# Altium PCB Optical Compressor V2.PcbDoc (part 2 of 2)
Units mm, origin at the board's own origin, x right, y up, seen from the top; angles counter-clockwise.
Board outline 47 x 95 mm, 4 copper layers (Top Copper, Ground Top, Ground Bottom, Bottom Copper), stack 1.706 mm thick; 141 components, 86 nets, 384 pads, 31 vias.
Unrouted connection lines stored in the file: 163.
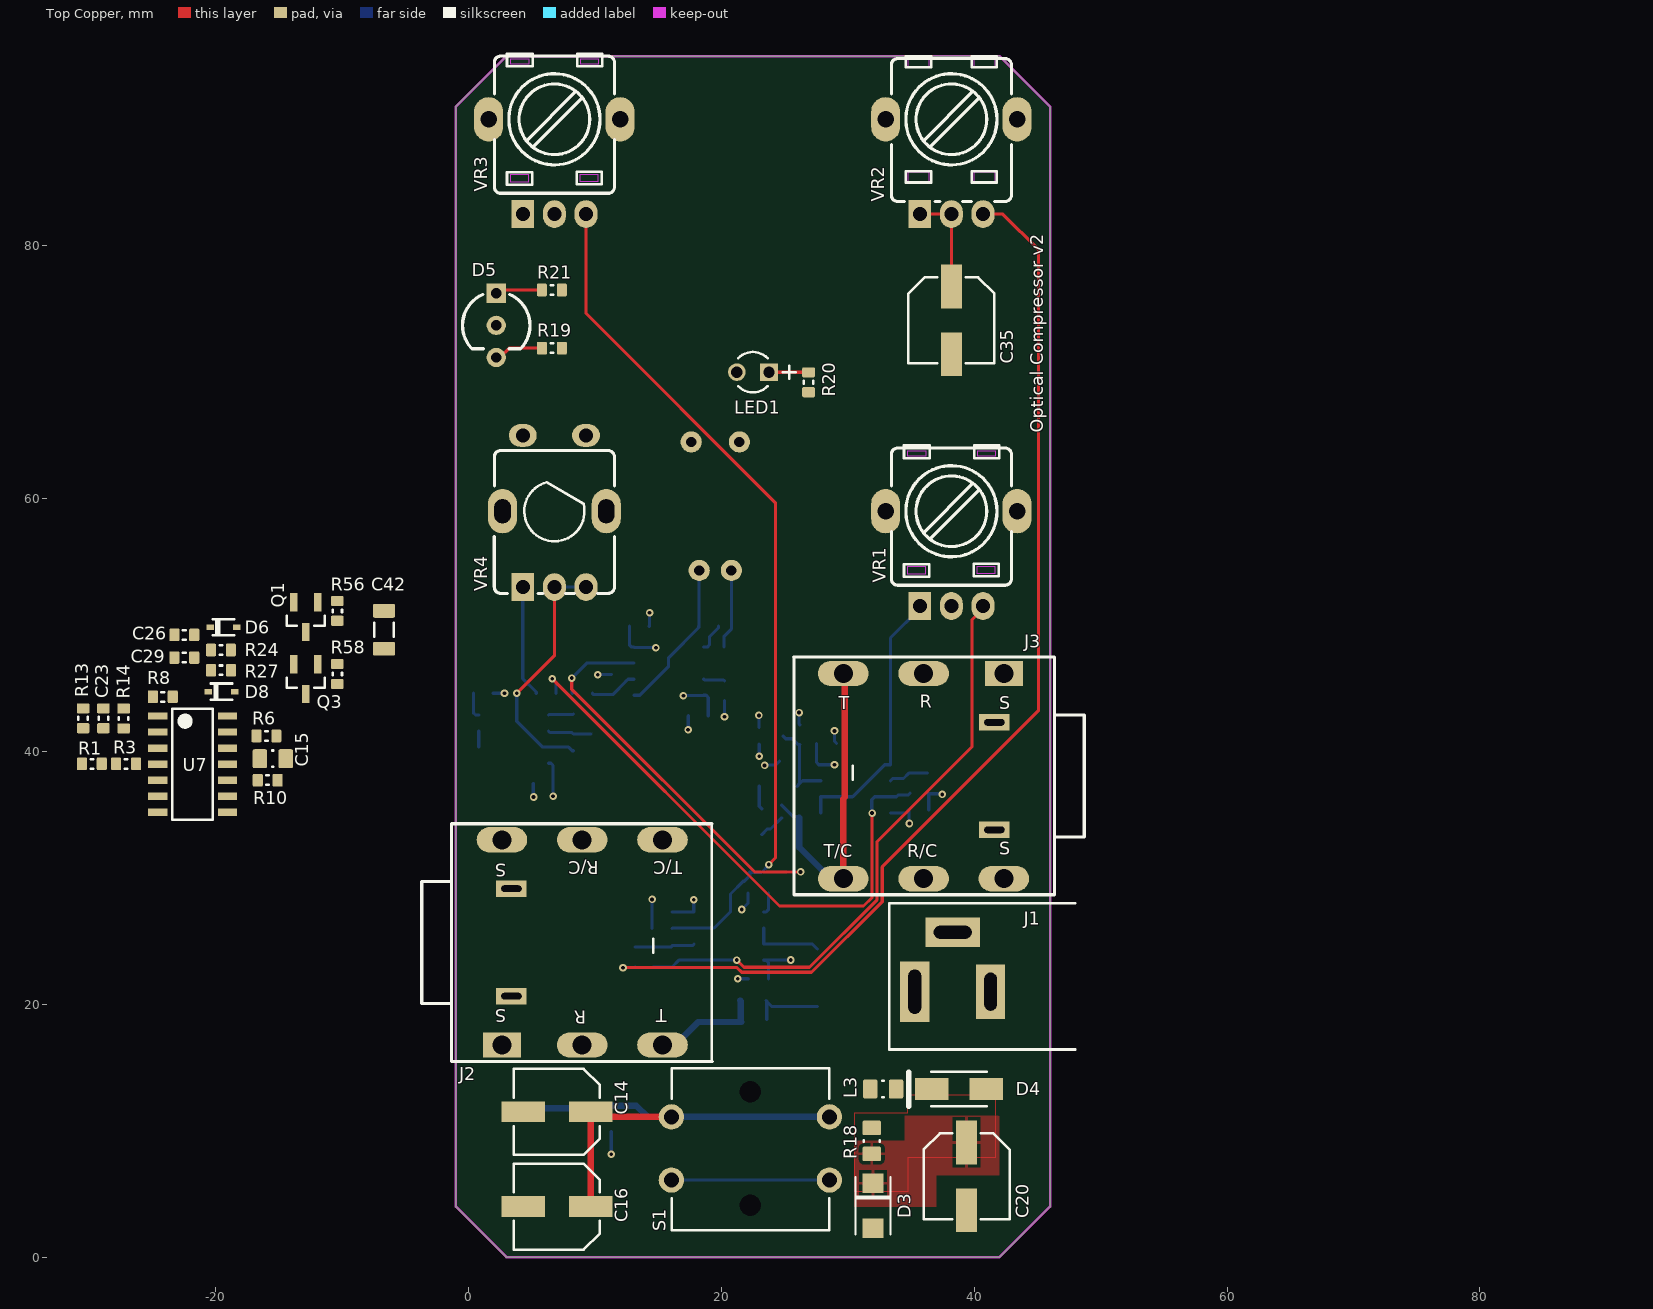
[diagram p0: Top Copper view]

## Part data (continued)
U1 U2 U4 U5: library part CMP-028-0012-7, "Operational Amplifiers - Op Amps Dual Low Noise JFET SOIC8", Case/Package=D, Dual Supply Voltage=9V, Input Bias Current=200pA, Input Offset Voltage (Vos)=3mV, Manufacturer 1="Texas Instruments", Max Dual Supply Voltage=18V, Max I/O Voltage=10mV, Max Operating Temperature=85°C, Min Dual Supply Voltage=3.5V, Min Operating Temperature=-40°C, Nominal Supply Current=5mA, Operating Supply Current=1.4mA, Package Quantity=75, Voltage Gain=106.02dB, Bandwidth=3MHz, Common Mode Rejection Ratio=70dB, ComponentLink1Description=http://www.ti.com/general/docs/lit/getliterature.tsp?genericPartNumber=TL072&&fileType=pdf&src-supplier=Avnet, ComponentLink1URL=http://www.ti.com/general/docs/lit/getliterature.tsp?genericPartNumber=TL072&&fileType=pdf&src-supplier=Avnet, ComponentLink2Description=https://www.distrelec.biz/Web/Downloads/_t/ds/tl07x-series_eng_tds.pdf?mime=application%2Fpdf&src-supplier=Distrelec, ComponentLink2URL=https://www.distrelec.biz/Web/Downloads/_t/ds/tl07x-series_eng_tds.pdf?mime=application%2Fpdf&src-supplier=Distrelec, ComponentLink3Description=http://www.ti.com/lit/ds/symlink/tl071a.pdf?src-supplier=Digi-Key, ComponentLink3URL=http://www.ti.com/lit/ds/symlink/tl071a.pdf?src-supplier=Digi-Key, ComponentLink4Description=http://www.farnell.com/datasheets/1862384.pdf?src-supplier=Element14, ComponentLink4URL=http://www.farnell.com/datasheets/1862384.pdf?src-supplier=Element14, ComponentLink5Description=http://focus.ti.com/lit/ds/symlink/tl074.pdf?src-supplier=Avnet+Asia, ComponentLink5URL=http://focus.ti.com/lit/ds/symlink/tl074.pdf?src-supplier=Avnet+Asia, Design Item ID=TL072CD, Gain Bandwidth Product=3MHz, Height=1.58mm, Lead Free="Lead Free", Length=4.9mm, Manufacturer Part Number 1=TL072CD, Nominal Gain Bandwidth Product=3MHz, Number of Amplifiers=2, Number of Channels=2, Number of Circuits=2, Number of Elements=2, Number of Pins=8, Operating Supply Voltage=18V, Packaging=Rail/Tube, PartId=1, Pricing 1="1 = 0.71000, 10 = 0.59500, 50 = 0.59500, 100 = 0.38400, 1000 = 0.30700, 10000 = 0.25000 (USD)", Radiation Hardening=No, REACH SVHC="No SVHC", RoHS=Yes, Slew Rate=13V/µs, Source=main.SchLib, Stock 1=14514, Unity Gain Bandwidth Product=3MHz, Width=3.91mm
U6: library part CMP-028-0019-6, "Operational Amplifiers - Op Amps 2-18V Quad Low Power Industrial Temp SOIC14", Case/Package=SOIC, Input Bias Current=500nA, Input Offset Voltage (Vos)=3mV, Manufacturer="ON Semiconductor", Manufacturer Part Number=MC33179DR2G, Max Dual Supply Voltage=18V, Max Operating Temperature=85°C, Min Dual Supply Voltage=2V, Min Operating Temperature=-40°C, Nominal Supply Current=1.7mA, Output Current=80mA, Output Current per Channel=100mA, Package Quantity=2500, Power Supply Rejection Ratio (PSRR)=80dB, Voltage Gain=106.02dB, Bandwidth=5MHz, Common Mode Rejection Ratio=80dB, ComponentLink1Description=https://datasheet.ciiva.com/30481/0900766b81276f1b-30481445.pdf?src-supplier=RSComponents, ComponentLink1URL=https://datasheet.ciiva.com/30481/0900766b81276f1b-30481445.pdf?src-supplier=RSComponents, ComponentLink2Description=https://datasheet.ciiva.com/5787/89824-5787686.pdf?src-supplier=Farnell, ComponentLink2URL=https://datasheet.ciiva.com/5787/89824-5787686.pdf?src-supplier=Farnell, ComponentLink3Description=https://datasheet.ciiva.com/26056/mc33178-d-26056822.pdf?src-supplier=Avnet+Europe, ComponentLink3URL=https://datasheet.ciiva.com/26056/mc33178-d-26056822.pdf?src-supplier=Avnet+Europe, ComponentLink4Description=https://datasheet.ciiva.com/1796/mc33178-d-1796957.pdf?src-supplier=Digi-Key, ComponentLink4URL=https://datasheet.ciiva.com/1796/mc33178-d-1796957.pdf?src-supplier=Digi-Key, ComponentLink5Description=https://datasheet.ciiva.com/1796/mc33178-d-1796959.pdf?src-supplier=Digi-Key, ComponentLink5URL=https://datasheet.ciiva.com/1796/mc33178-d-1796959.pdf?src-supplier=Digi-Key, ComponentLink6Description=https://datasheet.ciiva.com/2973/mc33178-d-2973668.pdf?src-supplier=Avnet, ComponentLink6URL=https://datasheet.ciiva.com/2973/mc33178-d-2973668.pdf?src-supplier=Avnet, ComponentLink7Description=https://datasheet.ciiva.com/16212/mc33178-d-16212327.pdf?src-supplier=Future+Electronics, ComponentLink7URL=https://datasheet.ciiva.com/16212/mc33178-d-16212327.pdf?src-supplier=Future+Electronics, ComponentLink8Description=https://datasheet.ciiva.com/8078/89824-8078570.pdf?src-supplier=Element14, ComponentLink8URL=https://datasheet.ciiva.com/8078/89824-8078570.pdf?src-supplier=Element14, ComponentLink9Description=https://datasheet.ciiva.com/1796/mc33178-d-1796958.pdf?src-supplier=Digi-Key, ComponentLink9URL=https://datasheet.ciiva.com/1796/mc33178-d-1796958.pdf?src-supplier=Digi-Key, ComponentLink10Description=http://datasheet.octopart.com/MC33179DR2G-ON-Semiconductor-datasheet-164248.pdf?src-supplier=Newark, ComponentLink10URL=http://datasheet.octopart.com/MC33179DR2G-ON-Semiconductor-datasheet-164248.pdf?src-supplier=Newark, ComponentLink11Description=http://datasheet.octopart.com/MC33179DR2G-ON-Semiconductor-datasheet-14137761.pdf?src-supplier=IIIC, ComponentLink11URL=http://datasheet.octopart.com/MC33179DR2G-ON-Semiconductor-datasheet-14137761.pdf?src-supplier=IIIC, ComponentLink12Description=http://datasheet.octopart.com/MC33179DR2G-ON-Semiconductor-datasheet-82522822.pdf?src-supplier=Newark, ComponentLink12URL=http://datasheet.octopart.com/MC33179DR2G-ON-Semiconductor-datasheet-82522822.pdf?src-supplier=Newark, Contact Plating=Tin, Design Item ID=MC33179D, Gain Bandwidth Product=5MHz, Halogen Free="Halogen Free", Height=1.5mm, Lead Free="Lead Free", Length=8.75mm, Max Supply Voltage=18V, Mouser part=863-MC33179DR2G, Nominal Gain Bandwidth Product=5MHz, Number of Amplifiers=4, Number of Channels=4, Number of Circuits=4, Number of Elements=4, Number of Pins=14, Operating Supply Current=1.7mA, Packaging="Tape and Reel", PartId=1, Pricing 1="1 = 0.97000, 10 = 0.86300, 100 = 0.67300, 500 = 0.55598, 1000 = 0.43893 (USD)", Radiation Hardening=No, REACH SVHC="No SVHC", Slew Rate=2V/µs, Source=main.SchLib, Stock 1=2859, Unity Gain Bandwidth Product=5MHz, Width=4mm
U7 U8: library part CMP-032-0004-3, "IC D-TYPE POS TRG DUAL 14SOIC", Case/Package=SOIC, Frequency=24MHz, High Level Output Current=-4.2mA, Low Level Output Current=6.8mA, Manufacturer="Texas Instruments", Manufacturer Part Number=CD4013BME4, Max Operating Temperature=125°C, Max Supply Voltage=18V, Min Operating Temperature=-55°C, Min Supply Voltage=3V, Package Quantity=50, Quiescent Current=20uA, Clock Edge Trigger Type="Positive Edge", ComponentLink1Description=https://datasheet.ciiva.com/14292/cd4013b-mil-14292615.pdf?src-supplier=Avnet, ComponentLink1URL=https://datasheet.ciiva.com/14292/cd4013b-mil-14292615.pdf?src-supplier=Avnet, ComponentLink2Description=https://datasheet.ciiva.com/1857/cd4013b-1857723.pdf?src-supplier=Digi-Key, ComponentLink2URL=https://datasheet.ciiva.com/1857/cd4013b-1857723.pdf?src-supplier=Digi-Key, Contact Plating=Gold, Design Item ID=CD4013BME, Lead Free="Lead Free", Logic Function=AND, Mount="Surface Mount", Number of Bits=2, Number of Bits per Element=1, Number of Circuits=2, Number of Elements=2, Number of Input Lines=1, Number of Output Lines=1, Number of Outputs=4, Number of Pins=14, Packaging=Rail/Tube, PartId=1, Polarity=Non-Inverting, Pricing 1="1 = 0,48000, 10 = 0,39400, 50 = 0,39400, 100 = 0,24000, 1000 = 0,18600, 10000 = 0,14800 (USD)", Propagation Delay=300ns, RoHS=Yes, Source=main.SchLib, Stock 1=2814, Turn-On Delay Time=45ns, Weight=0.004564oz
U9: library part CMP-0069-01166-3, "1.4MHz Cuk Converter, 5-pin SOT-23, Pb-Free", Manufacturer="Texas Instruments", PackageTopMarking=S40B*XTT, PowerWise=N, ComponentLink1Description="Datasheet URL", ComponentLink1URL=http://www.ti.com/general/docs/lit/getliterature.tsp?genericPartNumber=LM2611&fileType=pdf, CompType=Switcher, PackageDescription="Molded SOT-23, .115 x .063 x .040 in Body, 5 Lead, .0375 in Pitch", PackageReference=DBV0005A, PinCount=5, RoHS=Y
V1 V2: library part CMP-021-0016-3, "Varistor 0402 28VDC 6.8pF 10% Audio Line", Manufacturer=TDK, Manufacturer Part Number=AVRF101U6R8KT242, Design Item ID="Var AVRF101U6R8KT242", Pricing 1="1=0,37000, 10=0,34800, 100=0,12200, 500=0,10400, 1000=0,07100, 2500=0,05900 (USD)", RoHS=No, Source=jimi.SchLib, Stock 1=19800
VR1: library part CMP-028-0051-1, "LJV 9mm pot", Manufacturer Part Number="RP09110NOBA-H02-1484 (A104,KA15A6.5)", Darkglass part=D00-0000, Design Item ID="Pot100kA 9mm", PartId=1, Selective Soldering=YES, Set Position=1, Source=main.SchLib, Supplied by Darkglass=YES
VR2: library part CMP-04321-1, "LJV 9mm pot", Manufacturer Part Number 1=RP09110NOBA-H02-2253, Darkglass part=D00-0002, Design Item ID="Pot100kC 9mm", PartId=1, Selective Soldering=YES, Set Position=1, Source=main.SchLib, Supplied by Darkglass=YES
VR3: library part CMP-028-0051-2, "LJV 9mm pot", Manufacturer Part Number="RP09110NOBA-H02-1484 (A104,KA15A6.5)", Darkglass part=D00-0000, Design Item ID="Pot100kA 9mm", PartId=1, Selective Soldering=YES, Set Position=1, Source=main.SchLib, Supplied by Darkglass=YES
VR4: library part CMP-04127-2, "LJV 9mm pot D-shaft with switch", Manufacturer=LJV, Darkglass part=N/A, Design Item ID="Pot100kB 9mm D-shaft", PartId=1, Selective Soldering=YES, Set Position=1, Supplied by Darkglass=YES

## Via types
v1: diameter 0.6, hole 0.3, Top Copper to Bottom Copper, 31 vias

## Nets (pads, with @x,y where several pads share a name; then routed paths per layer and width w, separated by ;. In a path a pad name is that pad's centre, name@x,y a point inside that pad or via, vN(x,y) a via of type N, cw(c..) or ccw(c..) an arc to the next point about the centre after c; other vN are vias at no path point)
+9V: C8.1 C9.2 C10.2 C11.2 C13.2 C20.1 C21.2 C38.1 D3.2 D13.2 L1.1 R4.2 R18.2 R25.1 U1.8 U2.8 U4.8 U5.8 U6.4 U9.5 | length 14.8
  Bottom Copper w0.25: C13.2 0.388,43.055 0.563,42.88 U4.8 ; v1(11.3,8.15) R4.2 ; C10.2 12.73,48.43 12.905,48.255 U5.8 13.117,48.227 14.798,48.227 v1(14.825,48.2) ; D13.2 v1(22.975,42.85) ; U1.8 23.37,23.485 U1.8@23.555,23.485 ; C11.2 23.72,23.32 U1.8@23.555,23.485 ; v1(25.493,23.507) 25.488,23.501 23.571,23.501 U1.8@23.555,23.485 ; U2.8 34.608,35.145 C8.1 34.856,35.356 34.856,34.319 v1(34.875,34.3)
+9VD: C1.1 C14.1 C16.1 D1.2 R4.1 S1.1 S1.2 U7.14 U8.14 VR4.6 | length 40.2
  Top Copper w0.5: C16.1 C14.1 10.075,11.1 S1.1
  Bottom Copper w0.5: C1.1 3.2,11.213 3.775,11.788 D1.2 8.487,11.975 R4.1 13.285,11.975 14.16,11.1 S1.1 S1.2
-9V: C2.1 C3.1 C4.1 C5.1 C7.1 C18.2 C22.1 C27.2 D13.1 L2.2 R17.1 U1.4 U2.4 U4.4 U5.4 U6.11 | length 13.1
  Bottom Copper w0.25: U4.4 6.512,39.07 6.687,38.895 C7.1 6.694,37.469 6.694,36.456 v1(6.7,36.45) ; C3.1 16.105,27.305 U1.4 17.825,27.32 v1(17.825,28.275) ; v1(17,44.4) 17.022,44.422 18.587,44.422 U5.4 18.795,44.445 18.97,44.27 C5.1 ; D13.1 23,40.561 v1(23,39.625) ; C2.1 27.538,39.13 27.713,38.955 U2.4 27.868,38.953 28.948,38.953 v1(28.95,38.95)
Blend: C39.2 Q4.1 R57.2
Clean: Q2.1 R45.2 U2.1 U2.2 U2.5 VR1.1 | length 21.3
  Bottom Copper w0.25: U2.1 U2.2 30.385,36.415 32.925,38.955 U2.5 33.385,48.985 35.7,51.3 VR1.1
CompIn: C42.2 R60.1 U5.3 | length 1.7
  Bottom Copper w0.25: U5.3 18.674,45.651 20.186,45.651 R60.1
CompOut: C40.2 R26.1 U1.3 VR3.3 | length 68.7
  Top Copper w0.25: VR3.3 9.3,74.65 24.275,59.675 24.275,31.575 v1(23.75,31.05)
  Bottom Copper w0.25: R26.1 16.135,26.035 U1.3 19.435,26.035 20.725,27.325 20.725,28.725 21.733,29.733 21.826,29.733 22.25,30.157 C40.2 22.3,30.425 23.175,30.425 23.75,31 v1(23.75,31.05)
CV: OC1.A R35.1
GND: C1.2 C2.2 C3.2 C4.2 C5.2 C7.2 C8.2 C9.1 C10.1 C11.1 C13.1 C15.2 C17.2 C18.1 C20.2 C21.1 C26.2 C29.1 C30.2 C31.2 C32.1 C33.2 C35.2 C36.2 C37.2 C38.2 D1.1 D2.2 D3.1 D5.2 J1.1 J2.1 J2.2 J2.4 J2.5 J2.6 J3.1 J3.2 J3.5 J3.6 LED1.2 OC1.K R1.1 R2.1 R8.1 R9.1 R11.2 R13.2 R15.2 R22.2 R26.2 R29.1 R30.2 R32.1 R37.1 R46.2 R50.1 R52.1 R55.1 R59.1 R60.2 U4.5 U6.5 U6.10 U7.6 U7.7 U7.9 U7.11 U8.6 U8.7 U8.9 U8.11 U9.2 V1.1 V2.1 VR1.4 VR1.5 VR2.4 VR2.5 VR3.1 VR3.4 VR3.5 VR4.4 VR4.5 | length 17.1
  Bottom Copper w0.25: C13.1 v1(2.85,44.6) ; C7.2 5.131,37.456 5.131,36.419 v1(5.15,36.4) ; v1(10.225,46.075) R52.1 ; C10.1 14.315,49.91 14.315,50.965 v1(14.325,50.975) ; R26.2 C3.2 v1(14.525,28.3) ; v1(17.375,41.725) 17.385,41.735 17.385,42.815 C5.2 ; v1(20.25,42.75) R60.2 ; v1(21.3,22.025) 22.12,22.025 C11.1 ; v1(21.625,27.5) 22.1,27.975 R30.2 ; v1(23.425,38.9) 23.463,38.938 24.325,38.938 24.6,39.213 R46.2 ; v1(26.15,43.075) 26.15,42.162 C36.2 ; v1(28.95,41.625) 28.95,40.8 C2.2 ; R50.1 R50.1@36.369,36.656 ; C8.2 36.412,36.613 R50.1@36.369,36.656 ; v1(37.475,36.6) 37.419,36.656 R50.1@36.369,36.656
MB: Q3.1 R58.2 R61.2 U4.1 | length 2
  Bottom Copper w0.25: U4.1 6.376,42.921 8.259,42.921 R61.2
ModeOff: R19.2 R24.1 U7.2 U7.5
ModeOn: R21.2 R27.1 U7.1
NetC14_2: C14.2 R1.2 R3.2
NetC15_1: C15.1 R6.1 R10.1
NetC16_2: C16.2 R2.2 R5.2
NetC17_1: C17.1 R7.1 R12.1
NetC19_1: C19.1 U1.6 U1.7 | length 5.7
  Bottom Copper w0.25: U1.6 U1.7 27.21,24.765 C19.1
NetC19_2: C19.2 R22.1 R23.1 | length 5.7
  Bottom Copper w0.25: R23.1 23.598,20.247 R23.1@23.598,20.22 ; R22.1 23.598,18.809 R23.1@23.598,20.22 ; C19.2 23.994,19.825 R23.1@23.598,20.22
NetC22_2: C22.2 R11.1 R17.2 U9.3
NetC23_1: C23.1 R13.1 VR4.7
NetC23_2: C23.2 R8.2 R14.2
NetC24_1: C24.1 R15.1 S1.3 S1.4 | length 12.5
  Bottom Copper w0.25: S1.3 S1.4
NetC24_2: C24.2 R9.2 R16.2
NetC25_1: C25.1 L1.2 U9.1
NetC25_2: C25.2 D2.1 L2.1
NetC26_1: C26.1 D6.2 R24.2
NetC27_1: C27.1 R25.2 U9.4
NetC28_1: C28.1 R47.2 | length 1.9
  Bottom Copper w0.25: C28.1 23.003,37.247 23.003,35.672 R47.2
NetC28_2: C28.2 C36.1 D13.3 R46.1 U2.3 | length 6.8
  Bottom Copper w0.25: D13.3 25.1,41.011 25.627,41.011 26.1,40.538 C36.1 26.175,40.513 R46.1 C28.2@26.175,37.436 ; C28.2 26,37.261 C28.2@26.175,37.436 ; U2.3 26.424,37.685 C28.2@26.175,37.436
NetC29_2: C29.2 D8.2 R27.2
NetC30_1: C30.1 D7.2 R28.2
NetC31_1: C31.1 R29.2 R31.2 U6.12
NetC32_2: C32.2 D9.2 R38.2
NetC33_1: C33.1 R36.2 U6.3
NetC34_1: C34.1 R41.2 R42.1 U1.2 | length 4.7
  Bottom Copper w0.25: R41.2 R42.1 C34.1 16.12,24.645 17.72,24.645 U1.2
NetC34_2: C34.2 R42.2 U1.1 VR1.3 | length 47.1
  Top Copper w0.25: v1(21.225,23.5) 21.793,22.932 26.972,22.932 32.325,28.284 32.325,32.875 39.825,40.375 39.825,50.425 40.7,51.3 VR1.3
  Bottom Copper w0.25: R42.2 C34.2 16.1,22.95 16.645,23.495 U1.1 17.843,23.498 21.223,23.498 v1(21.225,23.5)
NetC35_1: C35.1 VR2.1 VR2.2 | length 8.2
  Top Copper w0.25: VR2.1 VR2.2 C35.1@38.2,76.775
NetC37_1: C37.1 U4.3 VR4.2 VR4.3 | length 19.8
  Top Copper w0.25: v1(3.825,44.6) 6.8,47.575 VR4.2
  Bottom Copper w0.25: v1(3.825,44.6) 3.825,42.39 5.875,40.34 7.922,40.34 8.2,40.062 C37.1 ; VR4.2 VR4.3
NetC39_1: C39.1 VR1.2
NetC40_1: C40.1 R53.2 U5.7 | length 32.6
  Top Copper w0.25: v1(8.175,45.8) 8.175,44.925 22.625,30.475 v1(26.275,30.475)
  Bottom Copper w0.25: R53.2 8.2,44.625 8.2,45.775 v1(8.175,45.8) 9.36,46.985 U5.7 ; C40.1 v1(26.275,30.475)
NetC41_1: C41.1 Q2.2 Q4.2
NetC42_1: C42.1 Q1.2 Q3.2
NetD4_A: D4.A J1.2
NetD4_K: D4.K L3.1
NetD5_1: D5.1 R21.1 | length 3.7
  Top Copper w0.25: D5.1 2.46,76.5 R21.1
NetD5_3: D5.3 R19.1 | length 3.9
  Top Copper w0.25: D5.3 2.477,71.16 3.217,71.9 R19.1
NetD6_1: D6.1 Q1.3 R56.1
NetD7_1: D7.1 Q2.3 R45.1
NetD8_1: D8.1 Q3.3 R58.1
NetD9_1: D9.1 Q4.3 R57.1
NetD11_1: D11.1 R39.1 R44.2
NetD11_2: D11.2 D12.1 U6.7
NetD12_2: D12.2 R43.2 R44.1 U6.6
NetJ2_3: J2.3 R23.2 V1.2 | length 8.7
  Bottom Copper w0.5: J2.3 16.35,16.785 18.165,18.6 V1.2 21.55,18.65 21.55,20.245 R23.2
NetJ3_3: J3.3 J3.4 L4.1 V2.2 | length 25
  Top Copper w0.5: J3.4 29.65,36.246 29.775,36.371 29.775,46.04 J3.3
  Bottom Copper w0.25: L4.1 25.66,34.865 26.06,34.865 V2.2 ; J3.4@28.65,29.935 J3.4
  Bottom Copper w0.5: V2.2 26.175,32.41 J3.4@28.65,29.935
NetL3_2: L3.2 R18.1
NetL4_2: L4.2 R47.1 | length 2.1
  Bottom Copper w0.25: R47.1 23.638,33.863 23.888,33.863 L4.2
NetLED1_1: LED1.1 R20.1 | length 3.1
  Top Copper w0.25: LED1.1 23.783,69.987 R20.1
NetOC1_C1: OC1.C1 R49.2 U5.5 | length 12.3
  Bottom Copper w0.25: U5.5 13.55,44.445 15.831,46.726 15.831,47.419 18.213,49.8 R49.2 18.234,49.921 18.234,54.299 OC1.C1
NetOC1_C2: OC1.C2 R59.2 | length 6.3
  Bottom Copper w0.25: R59.2 20.225,49.107 20.795,49.677 OC1.C2
NetR3_1: R3.1 U7.4
NetR5_1: R5.1 U8.4
NetR6_2: R6.2 U7.3 U7.13
NetR7_2: R7.2 U8.3 U8.13
NetR10_2: R10.2 U7.10
NetR12_2: R12.2 U8.10
NetR14_1: R14.1 U7.8
NetR16_1: R16.1 U8.8
NetR31_1: R31.1 R40.2 U6.8
NetR32_2: R32.2 R33.1 U6.2
NetR33_2: R33.2 R34.1 R43.1 U6.1
NetR34_2: R34.2 R39.2 R40.1 U6.9
NetR35_2: R35.2 R54.2 U6.14
NetR36_1: R36.1 VR3.2
NetR37_2: R37.2 R54.1 U6.13
NetR41_1: R41.1 VR2.3 | length 86.2
  Top Copper w0.25: v1(12.225,22.9) 21.238,22.9 21.607,22.532 27.138,22.532 32.725,28.119 32.725,30.875 45.1,43.25 45.1,79.675 42.275,82.5 VR2.3
  Bottom Copper w0.25: v1(12.225,22.9) 12.25,22.925 13.175,22.925 R41.1
NetR48_2: R48.2 VR4.1 | length 8.8
  Bottom Copper w0.25: VR4.1 4.3,45.762 5.363,44.7 R48.2
NetR49_1: R49.1 U5.1 U5.2 | length 2.3
  Bottom Copper w0.25: U5.1 18.895,48.255 19.07,48.43 19.07,49.083 19.787,49.8 R49.1
NetR50_2: R50.2 R51.2 U2.6 | length 3.2
  Bottom Copper w0.25: U2.6 33.56,37.86 34.41,37.86 34.838,38.287 R51.2 R50.2
NetR52_2: R52.2 R53.1 U5.6 | length 3.8
  Bottom Copper w0.25: R53.1 9.9,44.5 R52.2 11.425,44.5 12.455,45.53 12.455,45.54 12.63,45.715 U5.6
NetR55_2: R55.2 R61.1 U4.2 | length 3.5
  Bottom Copper w0.25: U4.2 6.446,41.499 8.189,41.499 R61.1 R55.2
NetU4_6: U4.6 U4.7 | length 1.3
  Bottom Copper w0.25: U4.6 U4.7
OutBuffer: C41.2 R30.1 U1.5 | length 1.8
  Bottom Copper w0.25: U1.5 23.545,27.305 23.72,27.48 R30.1@23.72,28.8
PreOut: Q1.1 R48.1 R51.1 R56.2 U2.7 | length 45.3
  Top Copper w0.25: v1(6.625,45.75) 24.6,27.775 31.25,27.775 31.925,28.45 v1(31.925,35.125)
  Bottom Copper w0.25: v1(6.625,45.75) 6.625,45.745 6.931,45.439 6.931,44.606 R48.1 ; v1(31.925,35.125) 31.902,35.148 31.902,36.186 32.132,36.415 33.845,36.415 33.991,36.561 34.786,36.561 R51.1
TactOff: R28.1 U8.2 U8.5
TactOn: R20.2 R38.1 U8.1
pads on no net: J1.3 J2.7 J2.8 J3.7 J3.8 S1. U7.12 U8.12

## Polygon pours and split planes (outlines as drawn)
+9V on Top Copper "+9V_L01_P020" (solid, pour order 20): 30.5,9.2 30.5,4 37,4 37,6.5 42,6.5 42,11.3 41.9,11.2 34.5,11.2 34.5,9.2
GND on Top Copper "NONET_L01_P016" (solid, remove dead copper, shelved, pour order 16): -1,4 3,0 42,0 46,4 46,91 42,95 3,95 -1,91
+9V on Top Copper "NONET_L01_P009" (solid, shelved, pour order 9): 30.5,11.4 30.5,5.2 34.8,5.2 34.8,7.9 41.7,7.9 41.7,12.8 34.7,12.8 34.7,11.4
GND on Bottom Copper "NONET_L04_P019" (solid, remove dead copper, shelved, pour order 19): -1,91 3,95 42,95 46,91 46,4 42,0 3,0 -1,4
-9V on Bottom Copper "NONET_L04_P010" (solid, shelved, pour order 10): 34.2,3 44.2,3 44.2,5.4 38.1,5.4 38.1,7.1 36.3,7.1 35.9,6.7 34.2,6.7
NetC22_2 on Bottom Copper "NONET_L04_P018" (solid, shelved, pour order 18): 32.1,9.1 32.1,6.9 35.8,6.9 36.1,7.2 38.4,7.2 38.4,9.1
+9V on Bottom Copper "NONET_L04_P017" (solid, shelved, pour order 17): 36.3,15.9 42.4,15.9 42.4,12.2 41.9,11.7 41.9,10.1 36.3,10.1
NetC25_2 on Bottom Copper "NONET_L04_P015" (solid, shelved, pour order 15): 40.3,5.7 45.6,5.7 45.6,12 43.5,12 43.5,10 43,10 43,7.7 40.3,7.7
GND on Ground Top "NONET_L02_P007" (solid, remove dead copper, shelved, pour order 7): -1,91 3,95 42,95 46,91 46,4 42,0 3,0 -1,4
GND on Ground Bottom "NONET_L03_P008" (solid, shelved, pour order 8): -1,91 3,95 42,95 46,91 46,4 42,0 3,0 -1,4

## Keep-outs
Keep-Out Layer:
  the board outline again, w0.2

## Silkscreen, mask and mechanical layers (free items; w line width, h text height)
Top Overlay:
  text "Optical Compressor v2" at 45.467,65.2 h1 r90
Bottom Overlay:
  lines w0.254: 34.5,6.3 34.5,2.8 36.6,2.8 36.6,3.5 38.1,3.5 ; 37.4,1.1 37.4,2.8 38.1,3.5 ; 38.4,7.6 38.6,7.6 39.5,6.7 39.5,3.5 38.1,3.5 ; 39.8,1.5 39.8,1.1 32.4,1.1 ; 32.4,1.1 32.4,0.6 24.5,0.6 24.5,4.5 24.6,4.4 30.7,4.4 30.7,3.6 30.7,3.4 31,3.4 32.4,3.4 32.4,1.1
Board:
  the board outline again, w0.2

## Text inside footprints (layer, text, board x,y; h text height)
J2: Top Overlay "S" at 3,31.1 h1 r180; Top Overlay "S" at 3,19.6 h1 r180; Top Overlay "R" at 9.3,19.5 h1 r180; Top Overlay "R/C" at 10.3,31.3 h1 r180; Top Overlay "T/C" at 16.9,31.3 h1 r180; Top Overlay "T" at 15.7,19.6 h1 r180
J3: Top Overlay "S" at 42,31.85 h1; Top Overlay "S" at 42,43.35 h1; Top Overlay "R" at 35.7,43.45 h1; Top Overlay "R/C" at 34.7,31.65 h1; Top Overlay "T/C" at 28.1,31.65 h1; Top Overlay "T" at 29.3,43.35 h1
OC1: Mechanical 13 "-" at 17.62,61.17 h1.27 r270; Mechanical 13 "+" at 19.843,61.171 h1.27 r270; Mechanical 13 "CELL" at 17.777,58.014 h1.02 r270